# Allegro board SCH-BH-FOE804-2352-1A-01.brd
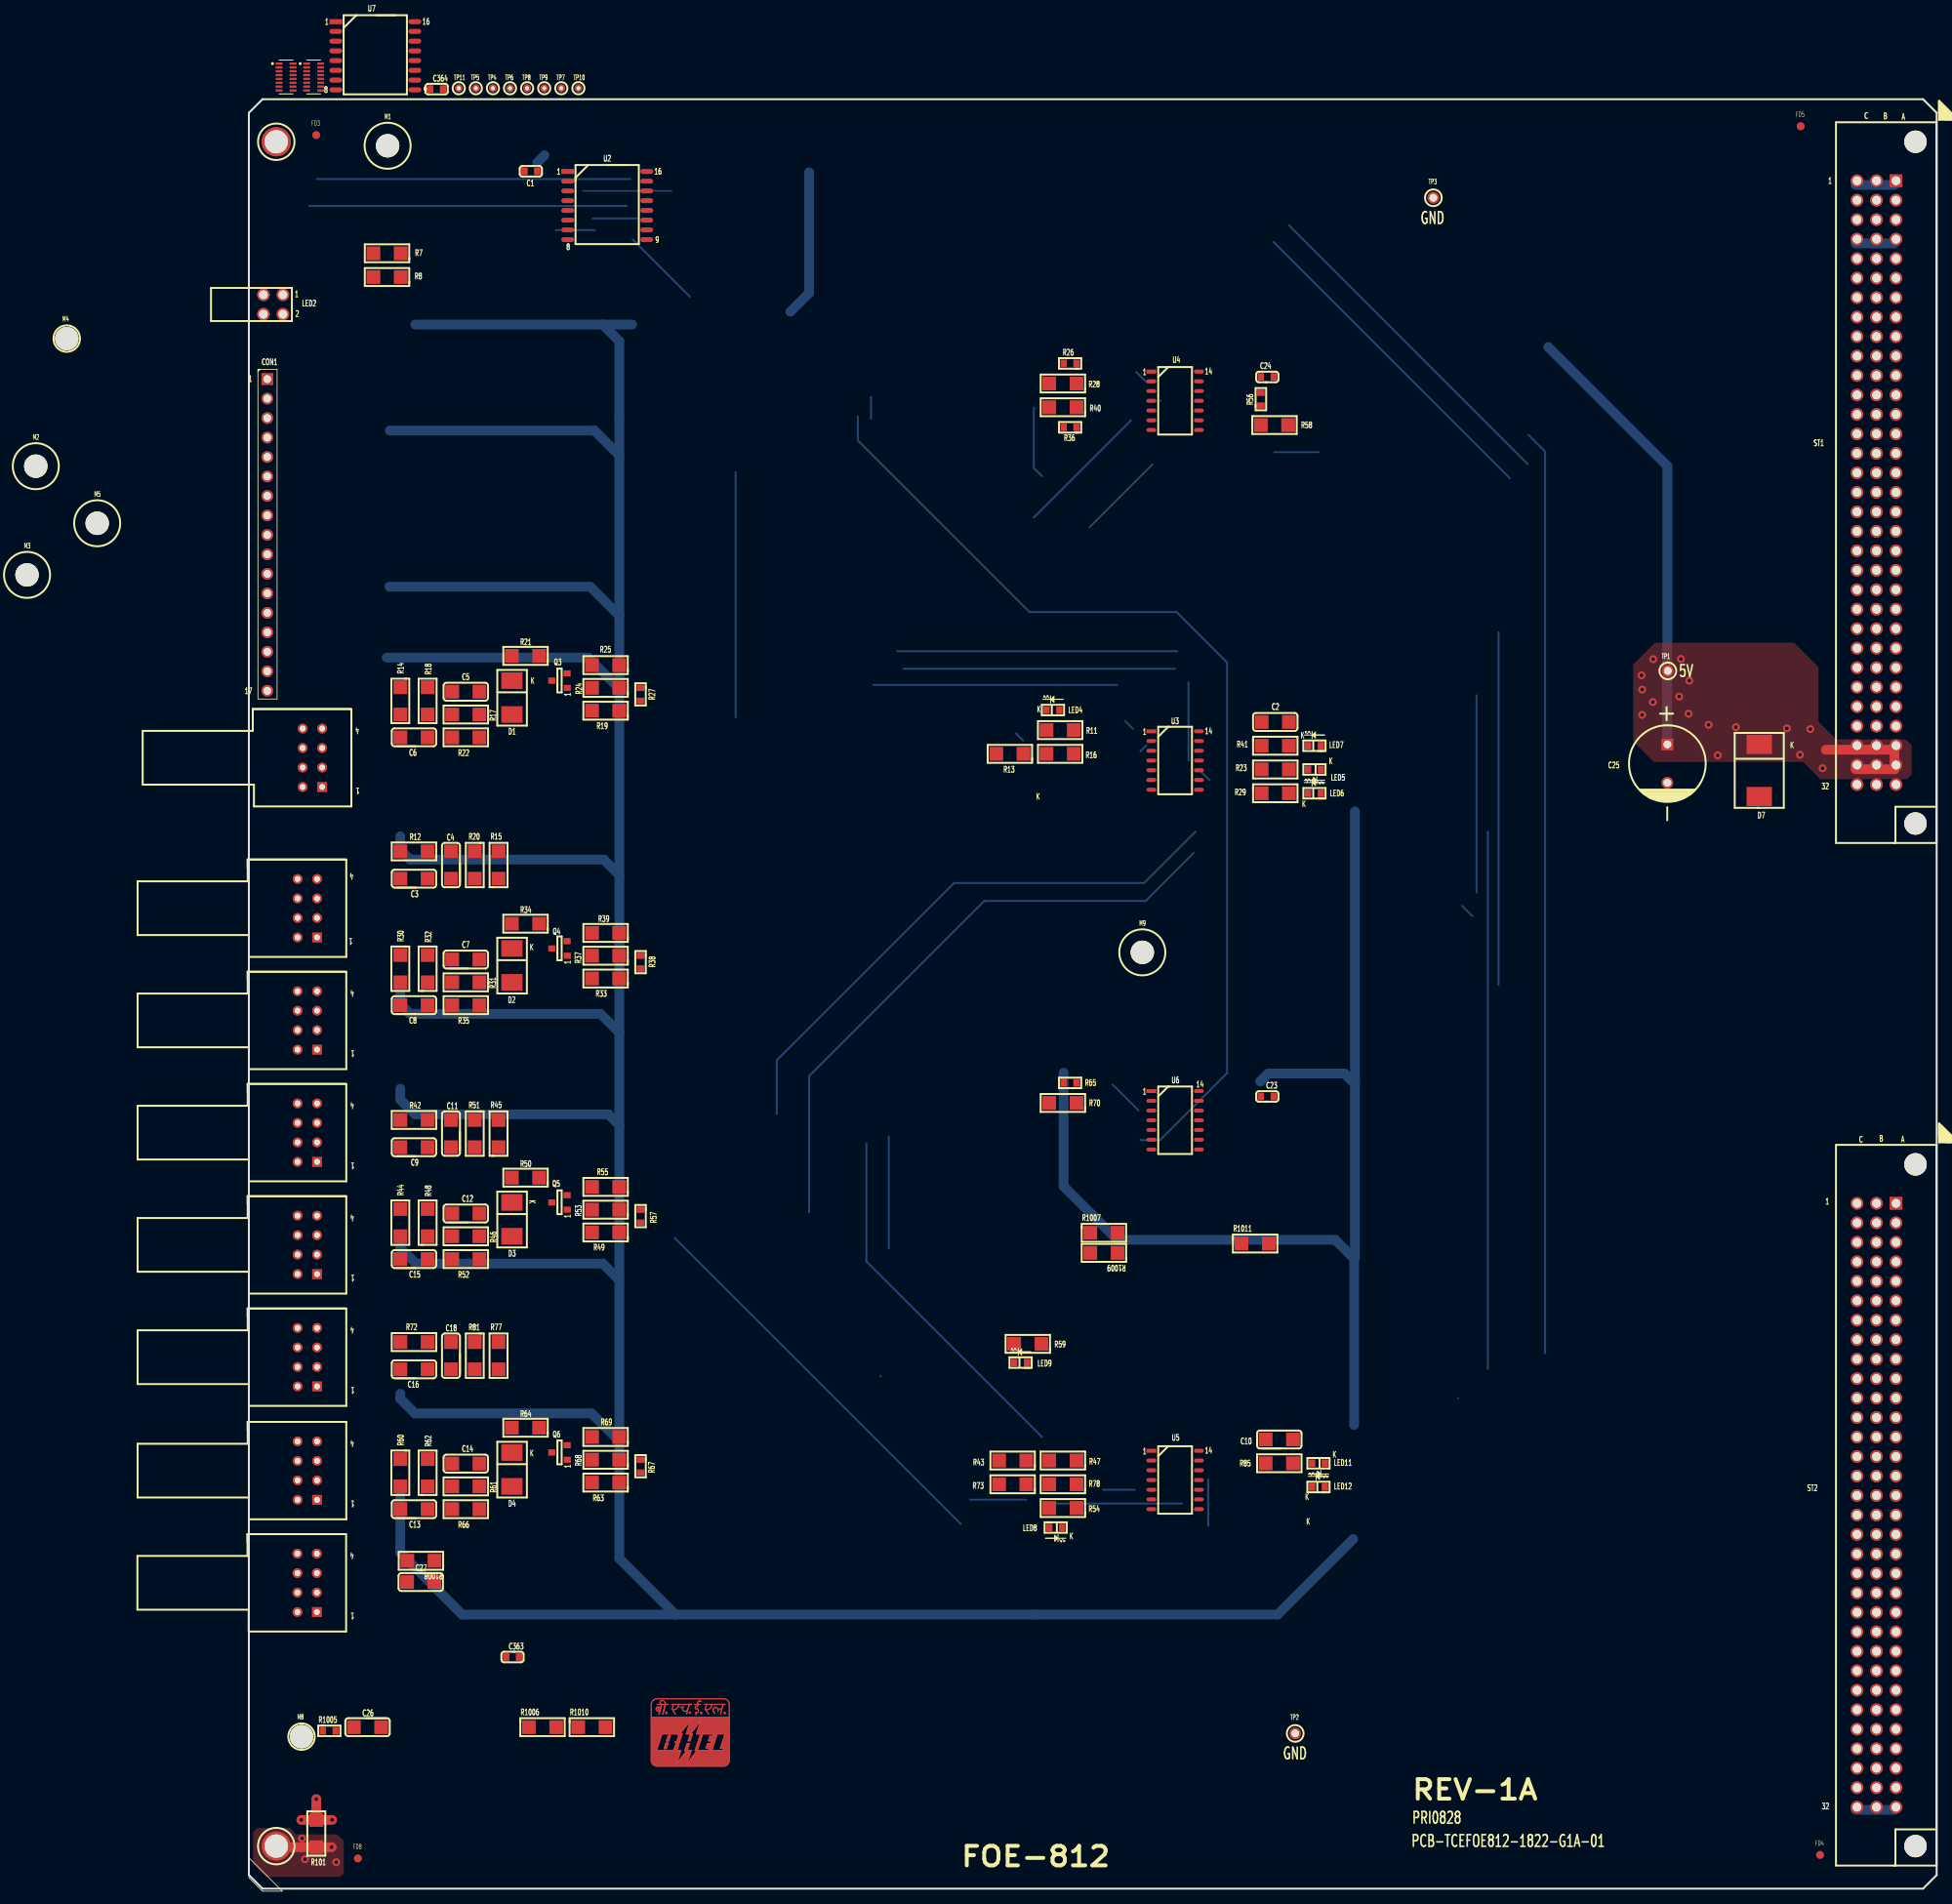
[diagram p0: board, top side]
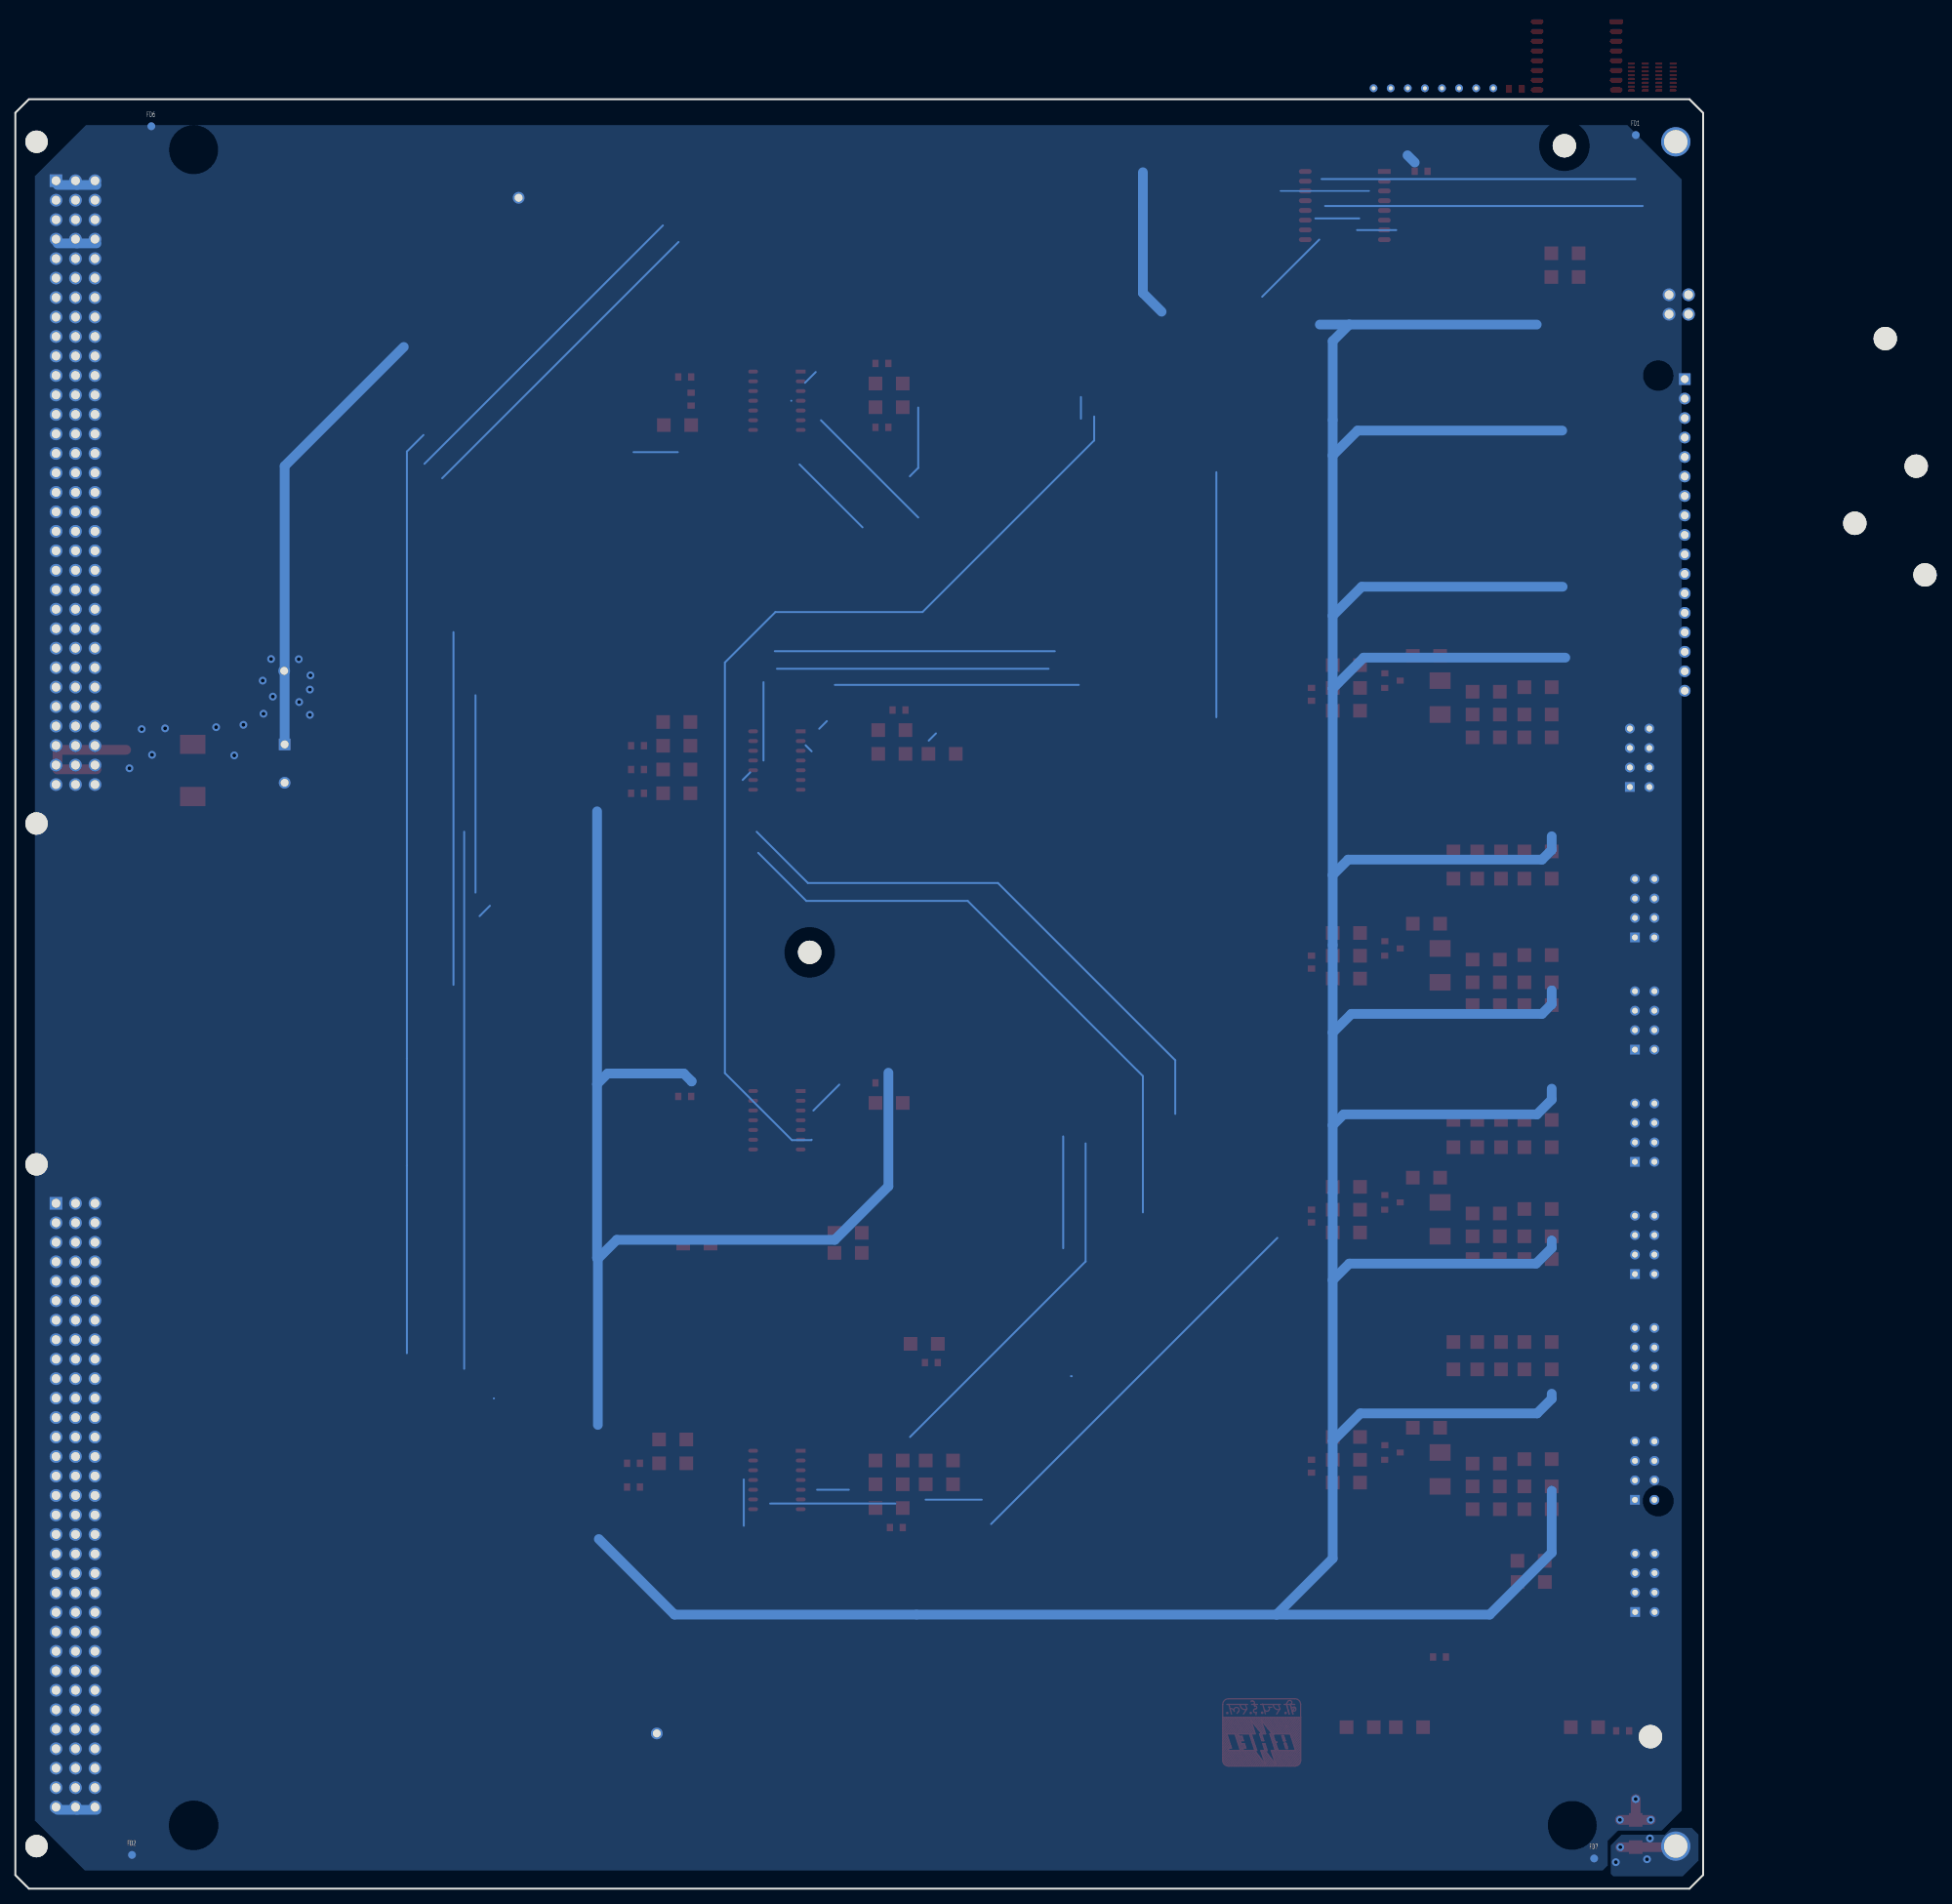
[diagram p1: board, bottom side, seen from below]

Outline 220 x 233.35 mm; copper layers: TOP, BOTTOM. Coordinates in mm from the lower left corner of the outline.
Outline path: 0,231.57 1.78,233.35 218.22,233.35 220,231.57 220,1.78 218.22,0 1.78,0 0,1.78 0,231.57

## Design rules (mm)
constraint set DEFAULT: min track width 0.203, pair gap 0.203

## Placement (name value [footprint] x y rotation side)
C1  100n-0603  [SM_C_0603]  36.75 223.95 0 top
C2  100n-1206  [SM_C_1206]  133.79 152.14 180 top
C3  100n-1206  [SM_C_1206]  21.52 131.7 180 top
C4  22p-1206  [SM_C_1206]  26.35 133.48 270 top
C5  68n-1206  [SM_C_1206]  28.28 156.08 180 top
C6  10u-1206  [SM_C_1206]  21.52 150.14 180 top
C7  68n-1206  [SM_C_1206]  28.28 121.16 180 top
C8  10u-1206  [SM_C_1206]  21.52 115.21 180 top
C9  100n-1206  [SM_C_1206]  21.52 96.69 180 top
C10  100n-1206  [SM_C_1206]  134.32 58.57 180 top
C11  22p-1206  [SM_C_1206]  26.35 98.46 270 top
C12  68n-1206  [SM_C_1206]  28.28 88.04 180 top
C13  10u-1206  [SM_C_1206]  21.52 49.49 180 top
C14  68n-1206  [SM_C_1206]  28.28 55.43 180 top
C15  10u-1206  [SM_C_1206]  21.52 82.1 180 top
C16  100n-1206  [SM_C_1206]  21.52 67.72 180 top
C18  22p-1206  [SM_C_1206]  26.35 69.5 270 top
C23  100n-0603  [SM_C_0603]  132.75 103.31 180 top
C24  100n-0603  [SM_C_0603]  132.75 197.13 180 top
C25  47u-UHE2A470MPD1TD  [CAP_TH_10D_5P]  184.9 146.71 270 top
C26  100n-1206  [SM_C_1206]  15.47 21.06 0 top
C27  22p-1206  [SM_C_1206]  22.4 39.98 0 top
C363  100n-0603  [SM_C_0603]  34.37 30.21 0 top
C364  100n-0603  [SM_C_0603]  24.48 234.67 0 top
CON1  7 SEG CONNECTOR  [17X1_TH_HEADER_M]  -5.22 176.53 0 top
D1  VS-10BQ015-M3/5BT  [DO_214AA]  34.28 155.32 90 top
D2  VS-10BQ015-M3/5BT  [DO_214AA]  34.28 120.4 90 top
D3  VS-10BQ015-M3/5BT  [DO_214AA]  34.28 87.28 90 top
D4  VS-10BQ015-M3/5BT  [DO_214AA]  34.28 54.67 90 top
D7  SMCJ5.0A-DO-214AB  [DO_214AB]  196.88 145.81 90 top
FD1  Fiducial_cir  [FUDICIAL_40X80]  8.78 228.67 180 bottom
FD2  Fiducial_cir  [FUDICIAL_40X80]  204.8 4.4 180 bottom
FD3  Fiducial_cir  [FUDICIAL_40X80]  8.78 228.67 0 top
FD4  Fiducial_cir  [FUDICIAL_40X80]  204.8 4.4 0 top
FD5  Fiducial_cir  [FUDICIAL_40X80]  202.27 229.82 0 top
FD6  Fiducial_cir  [FUDICIAL_40X80]  202.27 229.82 180 bottom
FD7  Fiducial_cir  [FUDICIAL_40X80]  14.21 3.94 180 bottom
FD8  Fiducial_cir  [FUDICIAL_40X80]  14.21 3.94 0 top
LED2  553-0113-200F  [LED_553]  3.17 206.58 0 top
LED4  LED RED-0603  [SM_LED_0603]  104.81 153.7 180 top
LED5  LED YELLOW-0603  [SM_LED_0603]  138.9 145.94 0 top
LED6  LED RED-0603  [SM_LED_0603]  138.9 142.84 180 top
LED7  LED RED-0603  [SM_LED_0603]  138.9 149.04 180 top
LED8  LED YELLOW-0603  [SM_LED_0603]  105.17 47.09 0 top
LED9  LED RED-0603  [SM_LED_0603]  100.6 68.61 180 top
LED11  LED YELLOW-0603  [SM_LED_0603]  139.42 55.47 0 top
LED12  LED YELLOW-0603  [SM_LED_0603]  139.42 52.38 180 top
M1  Mounting Hole  [MT_120_NP]  18.08 227.28 0 top
M2  Mounting Hole  [MT_120_NP]  -27.77 185.49 0 top
M3  Mounting Hole  [MT_120_NP]  -28.92 171.32 0 top
M4  Mounting Hole  [MT_CIR_120_NP]  -23.74 202.13 0 top
M5  Mounting Hole  [MT_120_NP]  -19.77 178.05 0 top
M6  Mounting Hole  [MT_CIR_120_PLATED]  3.57 5.55 0 top
M7  Mounting Hole  [MT_CIR_120_PLATED]  3.57 227.8 0 top
M8  Mounting Hole  [MT_CIR_120_NP]  6.87 19.82 0 top
M9  Mounting Hole  [MT_120_NP]  116.46 122.1 0 top
NOREF  -  []  -52.93 -171.77 0 top
Q3  MMBF170_SOT23  [SOT_23]  41.48 156.58 90 top
Q4  MMBF170_SOT23  [SOT_23]  41.48 121.65 90 top
Q5  MMBF170_SOT23  [SOT_23]  41.48 88.54 90 top
Q6  MMBF170_SOT23  [SOT_23]  41.48 55.93 90 top
R7  330R-1206  [SM_R_1206]  18.01 213.26 180 top
R8  330R-1206  [SM_R_1206]  18.01 210.16 180 top
R11  330R-1206  [SM_R_1206]  105.75 151.08 180 top
R12  560R-1206  [SM_R_1206]  21.52 135.26 180 top
R13  2K2-1206  [SM_R_1206]  99.2 147.98 180 top
R14  10K-1206  [SM_R_1206]  19.74 154.89 270 top
R15  10R-1206  [SM_R_1206]  32.54 133.48 90 top
R16  10R-1206  [SM_R_1206]  105.75 147.98 180 top
R17  33R-1206  [SM_R_1206]  28.28 153.11 180 top
R18  68R-1206  [SM_R_1206]  23.3 154.89 90 top
R19  2K2-1206  [SM_R_1206]  46.5 153.61 180 top
R20  47K-1206  [SM_R_1206]  29.44 133.48 270 top
R21  10R-1206  [SM_R_1206]  36.06 160.76 180 top
R22  33K-1206  [SM_R_1206]  28.28 150.14 180 top
R23  330R-1206  [SM_R_1206]  133.79 145.94 0 top
R24  10R-1206  [SM_R_1206]  46.5 156.58 180 top
R25  10K-1206  [SM_R_1206]  46.5 159.55 180 top
R26  2K2-0603  [SM_R_0603]  107.05 198.89 180 top
R27  2K2-0603  [SM_R_0603]  51.05 155.74 270 top
R28  0R-1206  [SM_R_1206]  106.11 196.28 180 top
R29  330R-1206  [SM_R_1206]  133.79 142.84 0 top
R30  10K-1206  [SM_R_1206]  19.74 119.96 270 top
R31  33R-1206  [SM_R_1206]  28.28 118.19 180 top
R32  68R-1206  [SM_R_1206]  23.3 119.96 90 top
R33  2K2-1206  [SM_R_1206]  46.5 118.68 180 top
R34  10R-1206  [SM_R_1206]  36.06 125.83 180 top
R35  33K-1206  [SM_R_1206]  28.28 115.21 180 top
R36  2K2-0603  [SM_R_0603]  107.05 190.56 180 top
R37  10R-1206  [SM_R_1206]  46.5 121.65 180 top
R38  2K2-0603  [SM_R_0603]  51.05 120.82 270 top
R39  10K-1206  [SM_R_1206]  46.5 124.63 180 top
R40  0R-1206  [SM_R_1206]  106.11 193.18 180 top
R41  330R-1206  [SM_R_1206]  133.79 149.04 0 top
R42  560R-1206  [SM_R_1206]  21.52 100.24 180 top
R43  2K2-1206  [SM_R_1206]  99.55 55.83 180 top
R44  10K-1206  [SM_R_1206]  19.74 86.85 270 top
R45  10R-1206  [SM_R_1206]  32.54 98.46 90 top
R46  33R-1206  [SM_R_1206]  28.28 85.07 180 top
R47  10R-1206  [SM_R_1206]  106.11 55.83 180 top
R48  68R-1206  [SM_R_1206]  23.3 86.85 90 top
R49  2K2-1206  [SM_R_1206]  46.5 85.57 180 top
R50  10R-1206  [SM_R_1206]  36.06 92.72 180 top
R51  47K-1206  [SM_R_1206]  29.44 98.46 270 top
R52  33K-1206  [SM_R_1206]  28.28 82.1 180 top
R53  10R-1206  [SM_R_1206]  46.5 88.54 180 top
R54  330R-1206  [SM_R_1206]  106.11 49.63 180 top
R55  10K-1206  [SM_R_1206]  46.5 91.51 180 top
R56  2K2-0603  [SM_R_0603]  131.91 194.23 90 top
R57  2K2-0603  [SM_R_0603]  51.05 87.7 270 top
R58  0R-1206  [SM_R_1206]  133.69 190.86 0 top
R59  330R-1206  [SM_R_1206]  101.54 71.04 180 top
R60  10K-1206  [SM_R_1206]  19.74 54.24 270 top
R61  33R-1206  [SM_R_1206]  28.28 52.46 180 top
R62  68R-1206  [SM_R_1206]  23.3 54.24 90 top
R63  2K2-1206  [SM_R_1206]  46.5 52.96 180 top
R64  10R-1206  [SM_R_1206]  36.06 60.1 180 top
R65  2K2-0603  [SM_R_0603]  107.05 105.07 180 top
R66  33K-1206  [SM_R_1206]  28.28 49.49 180 top
R67  2K2-0603  [SM_R_0603]  51.05 55.09 270 top
R68  10R-1206  [SM_R_1206]  46.5 55.93 180 top
R69  10K-1206  [SM_R_1206]  46.5 58.9 180 top
R70  0R-1206  [SM_R_1206]  106.11 102.46 180 top
R72  560R-1206  [SM_R_1206]  21.52 71.28 180 top
R73  2K2-1206  [SM_R_1206]  99.55 52.73 180 top
R77  10R-1206  [SM_R_1206]  32.54 69.5 90 top
R78  10R-1206  [SM_R_1206]  106.11 52.73 180 top
R81  47K-1206  [SM_R_1206]  29.44 69.5 270 top
R85  330R-1206  [SM_R_1206]  134.32 55.47 0 top
R101  0R-1206  [SM_R_1206]  8.79 7.19 270 top
R1005  10R-0603  [SM_R_0603]  10.49 20.58 0 top
R1006  560R-1206  [SM_R_1206]  38.28 21.06 0 top
R1007  2K2-1206  [SM_R_1206]  111.46 85.52 0 top
R1008  10R-1206  [SM_R_1206]  22.43 42.75 180 top
R1009  10R-1206  [SM_R_1206]  111.46 82.91 180 top
R1010  47K-1206  [SM_R_1206]  44.7 21.06 0 top
R1011  330R-1206  [SM_R_1206]  131.17 84.12 0 top
RN1  EXB-2HV331JV  [RESCAXE50P380X160X55-16N]  8.45 236.24 0 top
RN2  EXB-2HV331JV  [RESCAXE50P380X160X55-16N]  4.84 236.24 0 top
RX1  HFBR-2412TZ  [HFBR_1412]  6.35 127.85 180 top
RX2  HFBR-2412TZ  [HFBR_1412]  6.35 98.59 180 top
RX3  HFBR-2412TZ  [HFBR_1412]  6.35 69.31 180 top
RX4  HFBR-2412TZ  [HFBR_1412]  6.32 39.88 180 top
ST1  09036966921  [32X3_EURO_CONNECTOR_RA_REV]  212.16 183.35 180 top
ST2  09036966921  [32X3_EURO_CONNECTOR_RA_REV]  212.16 50 180 top
TP1  5V  [TP_CIR_40]  184.96 158.8 0 top
TP2  3.3V  [TP_CIR_40]  136.39 20.24 0 top
TP3  GND  [TP_CIR_40]  154.39 220.5 0 top
TP4  TP  [TP_20D_40A]  31.81 234.78 0 top
TP5  TP  [TP_20D_40A]  29.59 234.78 0 top
TP6  TP  [TP_20D_40A]  34.04 234.78 0 top
TP7  TP  [TP_20D_40A]  40.73 234.78 0 top
TP8  TP  [TP_20D_40A]  36.27 234.78 0 top
TP9  TP  [TP_20D_40A]  38.5 234.78 0 top
TP10  TP  [TP_20D_40A]  42.95 234.78 0 top
TP11  TP  [TP_20D_40A]  27.36 234.78 0 top
TX1  HFBR-1414TZ  [HFBR_1412]  7.01 147.47 180 top
TX2  HFBR-1414TZ  [HFBR_1412]  6.35 113.22 180 top
TX3  HFBR-1414TZ  [HFBR_1412]  6.35 83.95 180 top
TX4  HFBR-1414TZ  [HFBR_1412]  6.35 54.51 180 top
U2  CD4050BDWR_SOIC16  [SOIC_16]  46.86 219.61 0 top
U3  74HC14D_SOIC14  [SOIC_14]  120.73 147.11 0 top
U4  74HC08_SOIC14  [SOIC_14]  120.73 194.02 0 top
U5  74HC14D_SOIC14  [SOIC_14]  120.73 53.29 0 top
U6  74HC08_SOIC14  [SOIC_14]  120.73 100.2 0 top
U7  CD4050BDWR_SOIC16  [SOIC_16]  16.63 239.15 0 top

## Library data of the parts
C1-C16 C18 C23 C24 C26 C27 C363 C364 = CAP NP
C25 = capacitor_polarized
CON1 = 7 SEG CONNECTOR_0
D1-D4 D7 = DIODE SCHOTTKY_0
FD1-FD8 = Fiducial_cir
LED2 = LED-553
LED4-LED9 LED11 LED12 = LED
M1-M9 = Mounting Hole
Q3-Q6 = MOSFET_MMBF170
R7 R8 R11-R70 R72 R73 R77 R78 R81 R85 R101 R1005-R1011 = R
RN1 RN2 = EXB-Q16P681J
RX1-RX4 = HFBR2412
ST1 ST2 = 32x3 EURO CONNECTOR RA
TP1-TP3 = TP
TP4-TP11 = T POINT A
TX1-TX4 = HFBR1412
U2 U7 = CD4050BDWR
U3 U5 = 74HC14_SOIC14
U4 U6 = 74HC08_SOIC14

## Footprints (pads in the part's own frame, mm; a bottom-side part is the same pattern mirrored in y, then rotated)
17X1_TH_HEADER_M
  rect 1.524x1.524 hole 1.016: 1(7.62,20.32)
  round 1.524 hole 1.016: 2(7.62,17.78) 3(7.62,15.24) 4(7.62,12.7) 5(7.62,10.16) 6(7.62,7.62) 7(7.62,5.08) 8(7.62,2.54) 9(7.62,0) 10(7.62,-2.54) 11(7.62,-5.08) 12(7.62,-7.62) 13(7.62,-10.16) 14(7.62,-12.7) 15(7.62,-15.24) 16(7.62,-17.78) 17(7.62,-20.32)
32X3_EURO_CONNECTOR_RA_REV
  round 2.921 hole 2.921 unplated: (-5.08,44.45) (-5.08,-44.45)
  rect 1.651x1.651 hole 1.143: A1(-2.54,-39.37)
  round 1.651 hole 1.143: A2(-2.54,-36.83) A3(-2.54,-34.29) A4(-2.54,-31.75) A5(-2.54,-29.21) A6(-2.54,-26.67) A7(-2.54,-24.13) A8(-2.54,-21.59) A9(-2.54,-19.05) A10(-2.54,-16.51) A11(-2.54,-13.97) A12(-2.54,-11.43) A13(-2.54,-8.89) A14(-2.54,-6.35) A15(-2.54,-3.81) A16(-2.54,-1.27) A17(-2.54,1.27) A18(-2.54,3.81) A19(-2.54,6.35) A20(-2.54,8.89) A21(-2.54,11.43) A22(-2.54,13.97) A23(-2.54,16.51) A24(-2.54,19.05) A25(-2.54,21.59) A26(-2.54,24.13) A27(-2.54,26.67) A28(-2.54,29.21) A29(-2.54,31.75) A30(-2.54,34.29) A31(-2.54,36.83) A32(-2.54,39.37) B1(0,-39.37) B2(0,-36.83) B3(0,-34.29) B4(0,-31.75) B5(0,-29.21) B6(0,-26.67) B7(0,-24.13) B8(0,-21.59) B9(0,-19.05) B10(0,-16.51) B11(0,-13.97) B12(0,-11.43) B13(0,-8.89) B14(0,-6.35) B15(0,-3.81) B16(0,-1.27) B17(0,1.27) B18(0,3.81) B19(0,6.35) B20(0,8.89) B21(0,11.43) B22(0,13.97) B23(0,16.51) B24(0,19.05) B25(0,21.59) B26(0,24.13) B27(0,26.67) B28(0,29.21) B29(0,31.75) B30(0,34.29) B31(0,36.83) B32(0,39.37) C1(2.54,-39.37) C2(2.54,-36.83) C3(2.54,-34.29) C4(2.54,-31.75) C5(2.54,-29.21) C6(2.54,-26.67) C7(2.54,-24.13) C8(2.54,-21.59) C9(2.54,-19.05) C10(2.54,-16.51) C11(2.54,-13.97) C12(2.54,-11.43) C13(2.54,-8.89) C14(2.54,-6.35) C15(2.54,-3.81) C16(2.54,-1.27) C17(2.54,1.27) C18(2.54,3.81) C19(2.54,6.35) C20(2.54,8.89) C21(2.54,11.43) C22(2.54,13.97) C23(2.54,16.51) C24(2.54,19.05) C25(2.54,21.59) C26(2.54,24.13) C27(2.54,26.67) C28(2.54,29.21) C29(2.54,31.75) C30(2.54,34.29) C31(2.54,36.83) C32(2.54,39.37)
CAP_TH_10D_5P
  rect 1.524x1.524 hole 1.016: 1(-2.5,0)
  round 1.524 hole 1.016: 2(2.5,0)
DO_214AA
  rect 2.159x2.743 smd: 1(-2.21,0) 2(2.21,0)
DO_214AB
  rect 2.5x3.3 smd: 1(-3.4,0) 2(3.4,0)
FUDICIAL_40X80
  round 1.016 smd: 1(0,0)
HFBR_1412
  rect 1.27x1.27 hole 0.762: 1(-2.54,3.81)
  round 1.27 hole 0.762: 2(-2.54,1.27) 3(-2.54,-1.27) 4(-2.54,-3.81) 5(0,-3.81) 6(0,-1.27) 7(0,1.27) 8(0,3.81)
LED_553
  round 1.651 hole 1.143: 1(1.27,1.27) 2(1.27,-1.27) 3(-1.27,1.27) 4(-1.27,-1.27)
MT_120_NP
  round 3.048 hole 3.048 unplated: (0,0)
MT_CIR_120_NP
  round 3.048 hole 3.048 unplated: (0,0)
MT_CIR_120_PLATED
  round 3.81 hole 3.048: 1(0,0)
RESCAXE50P380X160X55-16N
  custom 0.89x0.29 smd: 1(-0.915,1.75) 2(-0.915,1.25) 3(-0.915,0.75) 4(-0.915,0.25) 5(-0.915,-0.25) 6(-0.915,-0.75) 7(-0.915,-1.25) 8(-0.915,-1.75) 9(0.915,-1.75) 10(0.915,-1.25) 11(0.915,-0.75) 12(0.915,-0.25) 13(0.915,0.25) 14(0.915,0.75) 15(0.915,1.25) 16(0.915,1.75)
SM_C_0603
  rect 0.813x0.965 smd: 1(-0.838,0) 2(0.838,0)
SM_C_1206
  rect 1.778x1.778 smd: 1(-1.778,0) 2(1.778,0)
SM_LED_0603
  rect 0.813x0.965 smd: 1(-0.838,0) 2(0.838,0)
SM_R_0603
  rect 0.813x0.965 smd: 1(-0.838,0) 2(0.838,0)
SM_R_1206
  rect 1.778x1.778 smd: 1(-1.778,0) 2(1.778,0)
SOIC_14
  rect 1.27x0.508 smd: 1(-3.1,3.81)
  oval 1.27x0.508 smd: 2(-3.1,2.54) 3(-3.1,1.27) 4(-3.1,0) 5(-3.1,-1.27) 6(-3.1,-2.54) 7(-3.1,-3.81) 8(3.1,-3.81) 9(3.1,-2.54) 10(3.1,-1.27) 11(3.1,0) 12(3.1,1.27) 13(3.1,2.54) 14(3.1,3.81)
SOIC_16
  rect 1.651x0.635 smd: 1(-5.303,4.313)
  oval 1.651x0.635 smd: 2(-5.303,3.043) 3(-5.303,1.773) 4(-5.303,0.503) 5(-5.303,-0.767) 6(-5.303,-2.037) 7(-5.303,-3.307) 8(-5.303,-4.577) 9(5.004,-4.577) 10(5.004,-3.307) 11(5.004,-2.037) 12(5.004,-0.767) 13(5.004,0.503) 14(5.004,1.773) 15(5.004,3.043) 16(5.004,4.313)
SOT_23
  rect 0.787x0.914 smd: 1(0,-0.025) 2(1.9,0) 3(0.95,2)
TP_20D_40A
  round 1.016 hole 0.508: 1(0,0)
TP_CIR_40
  round 1.524 hole 1.016: 1(0,0)

## Nets
GND_EARTH: M6.1(CENTER) R101.2
GND_SIGNAL: C1.1 C2.1 C3.1 C4.2 C6.1 C8.1 C9.1 C10.1 C11.2 C13.1 C15.1 C16.1 C18.2 C23.1 C24.1 C25.2 C26.1 C27.2 C363.1 C364.1 D7.1 LED2.1 LED5.2(CATHODE) LED8.2(CATHODE) LED11.2(CATHODE) LED12.2(CATHODE) Q3.2(S) Q4.2(S) Q5.2(S) Q6.2(S) R20.2 R22.1 R25.1 R35.1 R39.1 R51.2 R52.1 R55.1 R66.1 R69.1 R81.2 R101.1 R1010.2 RX1.3 RX1.7 RX2.3 RX2.7 RX3.3 RX3.7 RX4.3 RX4.7 ST1.A1 ST1.A4 ST1.A32 ST1.B1 ST1.B4 ST1.B32 ST1.C1 ST1.C4 ST1.C24 ST1.C26 ST1.C29 ST1.C32 ST2.A14 ST2.A16 ST2.A18 ST2.A32 ST2.B12 ST2.B14 ST2.B16 ST2.B18 ST2.B32 ST2.C12 ST2.C14 ST2.C16 ST2.C18 ST2.C32 TP2.1 TP3.1 U2.8(VSS) U3.7 U4.7 U5.7 U6.7 U7.8(VSS)
VCC_5: C1.2 C2.2 C3.2 C6.2 C8.2 C9.2 C10.2 C13.2 C15.2 C16.2 C23.2 C24.2 C25.1 C26.2 C363.2 C364.2 CON1.15 D7.2(K) LED4.1 LED6.1 LED7.1 LED9.1 R7.1 R8.1 R12.2 R13.2 R14.2 R19.1 R26.2 R27.2 R30.2 R33.1 R36.2 R38.2 R42.2 R43.2 R44.2 R49.1 R56.2 R57.2 R60.2 R63.1 R65.2 R67.2 R72.2 R73.2 R1006.2 R1007.2 RX1.2(VCC) RX2.2(VCC) RX3.2(VCC) RX4.2(VCC) ST1.A30 ST1.A31 ST1.B30 ST1.B31 ST1.C30 ST1.C31 TP1.1 TX1.2 TX1.6 TX1.7 TX2.2 TX2.6 TX2.7 TX3.2 TX3.6 TX3.7 TX4.2 TX4.6 TX4.7 U2.1 U3.14 U4.14 U5.14 U6.14 U7.1
VCC_15: ST1.A2 ST1.B2 ST1.C2
VCC_15N: ST1.A3 ST1.B3 ST1.C3
VCC_24: ST2.A30 ST2.A31 ST2.B30 ST2.B31 ST2.C30 ST2.C31
VCC_24N: ST2.A28 ST2.A29 ST2.B28 ST2.B29 ST2.C28 ST2.C29
FOE_ERROR1: RN2.16 U2.4
FOE_ERROR2: RN2.11 U2.6
FOE_ERROR3: RN2.12 U2.10
FOE_ERROR4: RN2.13 U2.12
FOE_TX1: RN1.16 U7.2
FOE_TX2: RN1.11 U7.4
FOE_TX3: RN1.12 U7.6
FOE_TX4: RN1.15 U7.10
PWM_ENABLE: R28.2 R40.2 R58.2 R70.2 R1005.1 U2.3
PWM_ERROR1: R13.1 R16.2 ST2.C15 U2.5
PWM_ERROR2: R43.1 R47.2 ST2.A17 U2.7
PWM_ERROR3: R73.1 R78.2 ST2.B17 U2.9
PWM_ERROR4: R1007.1 R1009.2 ST2.C17 U2.11
PWM_LED: LED2.3(C2) RN1.10 RN2.10 U2.2
PWM_TX1: ST2.B13 U4.1 U7.3
PWM_TX2: ST2.C13 U4.4 U7.5
PWM_TX3: ST2.A15 U4.9 U7.7
PWM_TX4: ST2.B15 U6.1 U7.9
S_PWM_TX1: R24.1 R27.1 U4.3
S_PWM_TX2: R37.1 R38.1 U4.6
S_PWM_TX3: R53.1 R57.1 U4.8
S_PWM_TX4: R67.1 R68.1 U6.3
N17426155: R14.1 R18.2 TX1.3
N17426250: R11.1 U3.2
N17426252: LED4.2(CATHODE) R11.2
N17426284: D1.2(K) Q3.3 R21.2 U3.1
N17426286: Q3.1 R19.2 R24.2 R25.2
N17426557: C5.2 R17.2 R18.1 R22.2
N17426569: C5.1 D1.1 R17.1
N17474180: LED2.2 R8.2
N17474315: LED2.4 R7.2
N17737482: R21.1 TP4.1(TP)
N17860660: C4.1 R12.1 R15.2 R20.1 RX1.6 TP5.1(TP) U3.11
N17860684: R15.1 U3.3
N17860692: LED5.1 R23.2
N17860694: R23.1 U3.10
N17860853: R16.1 U3.4
N17884311: C18.1 R72.1 R77.2 R81.1 RX3.6 TP9.1(TP) U5.13
N17884333: R77.1 U5.3
N17884337: LED11.1 R85.2
N17884339: R85.1 U5.12(Y)
N17884502: R78.1 U5.4
N17888829: C11.1 R42.1 R45.2 R51.1 RX2.6 TP7.1(TP) U3.13
N17888851: R45.1 U3.5
N17888855: LED8.1 R54.2
N17888857: R54.1 U3.12(Y)
N17889015: R47.1 U3.6
N17891177: R26.1 R28.1 U4.2
N17916583: R1005.2 ST1.B21
N17918561: C27.1 R1006.1 R1008.2 R1010.1 RX4.6 TP11.1(TP) U5.11
N17918610: R1008.1 U5.9
N17918612: R1009.1 U5.8
N17918692: R1011.1 U5.10
N17918694: LED12.1 R1011.2
N17919249: D4.2(K) Q6.3 R64.2 U5.5
N17919253: R41.1 U5.6
N17919255: LED7.2(CATHODE) R41.2
N17919279: R60.1 R62.2 TX4.3
N17919322: C14.1 D4.1 R61.1
N17919328: C14.2 R61.2 R62.1 R66.2
N17919350: R64.1 TP10.1(TP)
N17919404: Q6.1 R63.2 R68.2 R69.2
N17919942: D3.2(K) Q5.3 R50.2 U5.1
N17919946: R59.1 U5.2
N17919948: LED9.2(CATHODE) R59.2
N17919974: R44.1 R48.2 TX3.3
N17920015: C12.1 D3.1 R46.1
N17920021: C12.2 R46.2 R48.1 R52.2
N17920035: R50.1 TP8.1(TP)
N17920120: Q5.1 R49.2 R53.2 R55.2
N17920886: R56.1 R58.1 U4.10
N17921199: R65.1 R70.1 U6.2
N17922100: D2.2(K) Q4.3 R34.2 U3.9
N17922104: R29.1 U3.8
N17922106: LED6.2(CATHODE) R29.2
N17922132: R30.1 R32.2 TX2.3
N17922173: C7.1 D2.1 R31.1
N17922179: C7.2 R31.2 R32.1 R35.2
N17922193: R34.1 TP6.1(TP)
N17922278: Q4.1 R33.2 R37.2 R39.2
N17923660: R36.1 R40.1 U4.5
N17929859: CON1.16 RN2.1
N17929867: CON1.17 RN2.2
N17929902: CON1.11 RN2.3
N17929906: CON1.2 RN1.3
N17929982: CON1.10 RN2.4
N17929986: CON1.3 RN1.4
N17930024: CON1.9 RN2.5
N17930028: CON1.4 RN1.5
N17930046: CON1.13 RN2.6
N17930054: CON1.7 RN1.6
N17930072: CON1.14 RN2.7
N17930076: CON1.8(G2) RN1.7
N17930089: CON1.12 RN2.8
N17930093: CON1.1 RN1.8
N17940601: CON1.5 RN1.2
N17940610: CON1.6 RN1.1

Pads without a net: FD1 1; FD2 1; FD3 1; FD4 1; FD5 1; FD6 1; FD7 1; FD8 1; M7 1; RN1 9 13 14; RN2 9 14 15; RX1 1 4 5 8; RX2 1 4 5 8; RX3 1 4 5 8; RX4 1 4 5 8; ST1 A5 A6 A7 A8 A9 A10 A11 A12 A13 A14 A15 A16 A17 A18 A19 A20 A21 A22 A23 A24 A25 A26 A27 A28 A29 B5 B6 B7 B8 B9 B10 B11 B12 B13 B14 B15 B16 B17 B18 B19 B20 B22 B23 B24 B25 B26 B27 B28 B29 C5 C6 C7 C8 C9 C10 C11 C12 C13 C14 C15 C16 C17 C18 C19 C20 C21 C22 C23 C25 C27 C28; ST2 A1 A2 A3 A4 A5 A6 A7 A8 A9 A10 A11 A12 A13 A19 A20 A21 A22 A23 A24 A25 A26 A27 B1 B2 B3 B4 B5 B6 B7 B8 B9 B10 B11 B19 B20 B21 B22 B23 B24 B25 B26 B27 C1 C2 C3 C4 C5 C6 C7 C8 C9 C10 C11 C19 C20 C21 C22 C23 C24 C25 C26 C27; TX1 1 4 5 8; TX2 1 4 5 8; TX3 1 4 5 8; TX4 1 4 5 8; U2 13 14 15 16; U4 11 12 13; U6 4 5 6 8 9 10 11 12 13; U7 11 12 13 14 15 16

## Via types
v1: diameter 1.016, hole 0.508, TOP to BOTTOM, 23 vias

## Routing (per net, layer and track width the routed paths; a pad name or vN(x,y) marks a point on that pad's centre or on a via; arc(x,y) is an arc through that point)
GND_EARTH: length 7.9
  TOP w1.27: v1(10.79,5.41) R101.2 2.95,5.41 2.95,5.41
  vias: v1(6.93,6.55) v1(7.32,3.84) v1(11.38,3.45)
GND_SIGNAL: length 1892.2
  TOP w1.27: R101.1 v1(6.83,8.97) ; R101.1 v1(10.85,8.97) ; R101.1 v1(8.79,11.68)
  BOTTOM w0.203: 55.09,221.39 43.54,221.39
  BOTTOM w0.254: 125.2,144.58 124.21,145.57 ; 114.99,191.48 102.3,178.8 ; 79.38,191.97 79.38,188.85 101.75,166.47 120.93,166.47 127.51,159.89 127.51,106.35 118.77,97.61 116.25,97.61 116.2,97.66 ; 162.89,117.86 162.89,163.86 ; 121.01,161.37 84.51,161.37 ; 44.83,217.81 50.55,217.81 ; 81.1,191.69 81.1,194.51 ; 123.16,135.08 116.89,128.8 95.86,128.8 73.03,105.97 73.03,88.19 ; 114.22,152.25 115.21,151.26 ; 161.49,67.79 161.49,137.82 ; 166.8,189.56 168.96,187.4 168.96,69.82 ; 123.37,137.82 116.69,131.14 91.92,131.14 68.81,108.03 68.81,101.03 ; 116.2,148.31 116.99,149.1 ; 111.35,52.02 115.49,52.02 ; 92.81,47.55 55.5,84.86 ; 109.58,177.52 117.78,185.73 ; 166.67,185.8 135.59,216.89 ; 115.67,197.76 117.07,196.37 ; 158.14,128.17 159.49,126.82 ; 103.38,58.9 80.49,81.79 80.49,97.18 ; 105.28,50.22 121.62,50.22 ; 125.05,47.32 125.05,53.37 ; 160.02,129.9 160.02,155.63 ; 8.84,222.94 49.73,222.94 ; 100,150.65 100.94,149.71 ; 82.4,66.83 82.3,66.83 ; 139.42,187.33 133.65,187.33 ; 101.35,50.72 94.03,50.72 ; 122.48,157.33 122.48,147.11 ; 102.31,193.14 102.31,185.27 103.4,184.18 ; 49.28,219.43 7.87,219.43 ; 157.61,63.93 157.63,63.93 ; 112.6,104.85 115.98,101.47 ; 63.45,184.71 63.45,152.76 ; 164.36,183.92 133.55,214.73 ; 83.41,98.1 83.41,83.52 ; 45.11,216.28 40.01,216.28 ; 113.18,156.97 81.38,156.97 ; 118.86,194.03 118.85,194.02 ; 57.48,207.59 50.04,215.04 ; 85.32,159.08 120.73,159.08
  BOTTOM w1.27: 55.6,35.74 134.09,35.74 143.94,45.59 ; 55.6,35.74 27.81,35.74 19.74,43.82 19.74,51.89 ; 55.6,35.74 48.29,43.05 48.29,58.37 ; 214.51,10.28 209.43,10.28 ; 48.29,79.35 48.29,58.37 ; 48.29,79.35 48.29,99.54 ; 48.29,79.35 46.13,81.51 21.77,81.51 19.74,83.54 19.74,84.53 ; 48.29,58.37 44.68,61.98 21.64,61.98 19.74,63.88 19.74,64.54 ; 144.07,82.14 144.07,60.48 ; 144.07,82.14 144.17,82.25 144.17,104.93 ; 144.07,82.14 141.6,84.61 113.18,84.61 106.2,91.59 106.2,106.4 ; 144.17,104.93 144.17,140.49 ; 144.17,104.93 142.8,106.3 132.87,106.3 131.85,105.28 131.85,105.26 ; 46.13,203.96 21.69,203.96 ; 46.13,203.96 48.29,201.8 48.29,186.89 ; 46.13,203.96 49.96,203.96 ; 48.29,186.89 45.04,190.14 18.36,190.14 ; 48.29,186.89 48.29,165.99 ; 209.43,214.55 214.51,214.55 ; 48.29,111.63 48.29,99.54 ; 48.29,111.63 48.29,132.18 ; 48.29,111.63 45.85,114.07 21.01,114.07 19.74,115.34 19.74,117.15 ; 48.29,99.54 46.86,100.97 21.67,100.97 19.74,102.9 19.74,104.32 ; 48.29,132.18 48.29,156.49 ; 48.29,132.18 46.28,134.19 21.01,134.19 19.74,135.46 19.74,137.24 ; 48.29,156.49 48.29,165.99 ; 48.29,156.49 44.25,160.53 17.96,160.53 ; 73.03,223.83 73.03,208.08 70.59,205.64 ; 209.43,222.17 214.51,222.17 ; 37.59,225.1 38.53,226.03 ; 48.29,165.99 44.5,169.77 18.31,169.77
VCC_5: length 74.9
  TOP w1.27: 205.56,148.51 214.51,148.51 214.51,145.97 209.43,145.97
  BOTTOM w1.27: 169.37,201.04 184.9,185.51 184.9,158.86 TP1.1 184.9,158.74 C25.1
  vias: v1(181.53,158.22) v1(181.61,156.36) v1(181.61,153.06) v1(183.01,154.74) v1(183.06,160.33) v1(186.44,155.45) v1(186.66,160.35) v1(187.66,153.21) v1(187.76,157.53) v1(190.27,151.77) v1(191.47,147.78) v1(193.83,151.46) v1(200.48,151.31) v1(202.18,147.85) v1(203.53,151.21) v1(205.13,146.1)

## Copper pours and planes (outline as drawn; the poured copper is in the pictures)
GND_EARTH on TOP: 11.91,1.55 2.24,1.55 0.56,3.23 0.56,7.37 1.12,7.93 5.28,7.93 6.12,7.09 11.51,7.09 12.37,6.22 12.37,2.01
GND_EARTH on BOTTOM: 0.58,7.04 0.58,3.68 2.64,1.63 11.73,1.63 12.04,1.93 12.04,5.66 10.67,7.04 5.03,7.04 4.14,7.93 1.47,7.93
GND_SIGNAL on BOTTOM: 5.41,7.57 2.79,10.19 2.79,222.89 9.88,229.97 16.2,229.97 18.08,224 19.96,229.97 210.79,229.97 217.45,223.32 217.45,8.86 210.95,2.36 13.11,2.36 12.42,3.05 12.42,6.25 11.1,7.57 ; 6 cut-outs
VCC_5 on TOP: 201.4,162.48 183.31,162.48 180.44,159.61 180.44,149.63 183.16,146.91 202.59,146.91 204.83,144.68 216.1,144.68 216.76,145.34 216.76,149.05 215.95,149.86 206.91,149.86 204.6,152.17 204.6,159.28
VCC_5 on BOTTOM: 185.52,162.48 184.28,162.48 180.44,158.65 180.44,149.63 183.16,146.91 202.59,146.91 204.83,144.68 216.1,144.68 216.76,145.34 216.76,149.05 215.95,149.86 206.25,149.86 203.91,152.2 192.61,152.2 189.48,155.32 189.48,158.52

## Text on the board
User.Comments: BOTTOM SIGNAL LAYER2 1 Oz FINISH Cu | TOP SIGNAL LAYER1 1 Oz FINISH Cu | CORE/PREPAGE | PCB THICKNESS | 1.6mm
Ref Des/Silkscreen Top: K | GND | PCB-TCEFOE812-1822-G1A-01 | PRI0828 | 5V | FOE-812 | REV-1A
PAGE_OUTLINE: 1A | 6. UL LOGO REQUIRED.
User.11: FIGURE | SIZE | 13.0 | 20.0 | 30.0 | 40.0 | 45.0 | 120.0 | 115.0 | DRILL CHART: TOP to BOTTOM | ALL UNITS ARE IN MILS | TOLERANCE | +3.0/-3.0 | PLATED | NON-PLATED | QTY | 56 | 100 | 72 | 6 | 204 | 2 | 4 | 7
